# EAGLE board Fantabulous Elzing (EAGLE 9.7.0)

Size 107.84 x 105.63 mm. Coordinates in mm from the lower left corner, seen from the top.
Outline: 0,0 107.84,0 107.84,105.63 0,105.63 0,0
Copper layers (1*16): Top 0.035mm / dielectric 1.5mm / Bottom 0.035mm
Design rules "default": minimum track width 6mil, minimum drill 0.35mm, track to track 6mil, track to pad 6mil, pad to pad 6mil, via to via 6mil, smd to smd 6mil, copper to edge 40mil, drill to drill 6mil, minimum pad ring 10mil, minimum via ring 8mil, stop-mask expansion 4mil, vias tented up to drill 0mil, thermal gap 10mil

## Footprints (pad centres in the part's own frame; a part is rotated, then mirrored left to right if it is on the bottom)
MOTOR = drill 1.118 pad 3.15 octagon: + 2.54,0; - -2.54,0
PIEZO = drill 1 pad 1.6: 1 -3.5,0; 2 3.5,0
RESAD1016W63L850D250B = drill 0.83 pad 1.43: 1 -5.08,0; 2 5.08,0
TO92 = drill 0.813 octagon: 1 -1.27,0; 2 0,1.905; 3 1.27,0
ARDUINO-UNO-R3-SHIELD = drill 1.016 pad 1.88: 3.3V 24.13,-2.54; 5V 24.13,0; A0 24.13,12.7; A1 24.13,15.24; A2 24.13,17.78; A3 24.13,20.32; A4 24.13,22.86; A5 24.13,25.4; AREF -24.13,-13.97; D2 -24.13,20.32; D3 -24.13,17.78; D4 -24.13,15.24; D5 -24.13,12.7; D6 -24.13,10.16; D7 -24.13,7.62; D8 -24.13,3.81; D9 -24.13,1.27; D10 -24.13,-1.27; D11 -24.13,-3.81; D12 -24.13,-6.35; D13 -24.13,-8.89; GND@0 24.13,2.54; GND@1 24.13,5.08; GND@2 -24.13,-11.43; IOREF 24.13,-7.62; NC 24.13,-10.16; RES 24.13,-5.08; RX -24.13,25.4; SCL -24.13,-19.05; SDA -24.13,-16.51; TX -24.13,22.86; VIN 24.13,7.62

## Placement (x,y rotation side)
MMOTOR  MOTOR_HDR  [MOTOR]  99.58,43.77 0 top
PIEZOBUZZER  PIEZO  [PIEZO]  40.82,92.05 0 top
R2  0.3043k  [RESAD1016W63L850D250B]  68.61,89.56 90 top
UTEMP  TMP36GT9Z_TO92  [TO92]  92.16,4.83 0 top
UUNO  ARDUINO-UNO-R3-SHIELD  [ARDUINO-UNO-R3-SHIELD]  47.88,51.84 270 top

## Library data of the parts
MMOTOR PIEZOBUZZER R2 UTEMP UUNO = Tinkercad

## Nets
MMOTOR_+: MMOTOR.+ R2.2
UUNO_5V: UTEMP.3 UUNO.5V
UUNO_A0: UTEMP.2 UUNO.A0
UUNO_D2: R2.1 UUNO.D2
UUNO_D4: PIEZOBUZZER.1 UUNO.D4
UUNO_GND: MMOTOR.- PIEZOBUZZER.2 UTEMP.1 UUNO.GND@0 UUNO.GND@1 UUNO.GND@2

## Tracks (layer width: path | path; a pad name or v marks a point on that pad's centre or on a via)
MMOTOR_+  (1 unrouted)
UUNO_5V  (1 unrouted)
UUNO_A0  (1 unrouted)
UUNO_D2  (1 unrouted)
UUNO_D4  (1 unrouted)
UUNO_GND  (5 unrouted)